# Allegro board imx6 rex_v1i2.brd
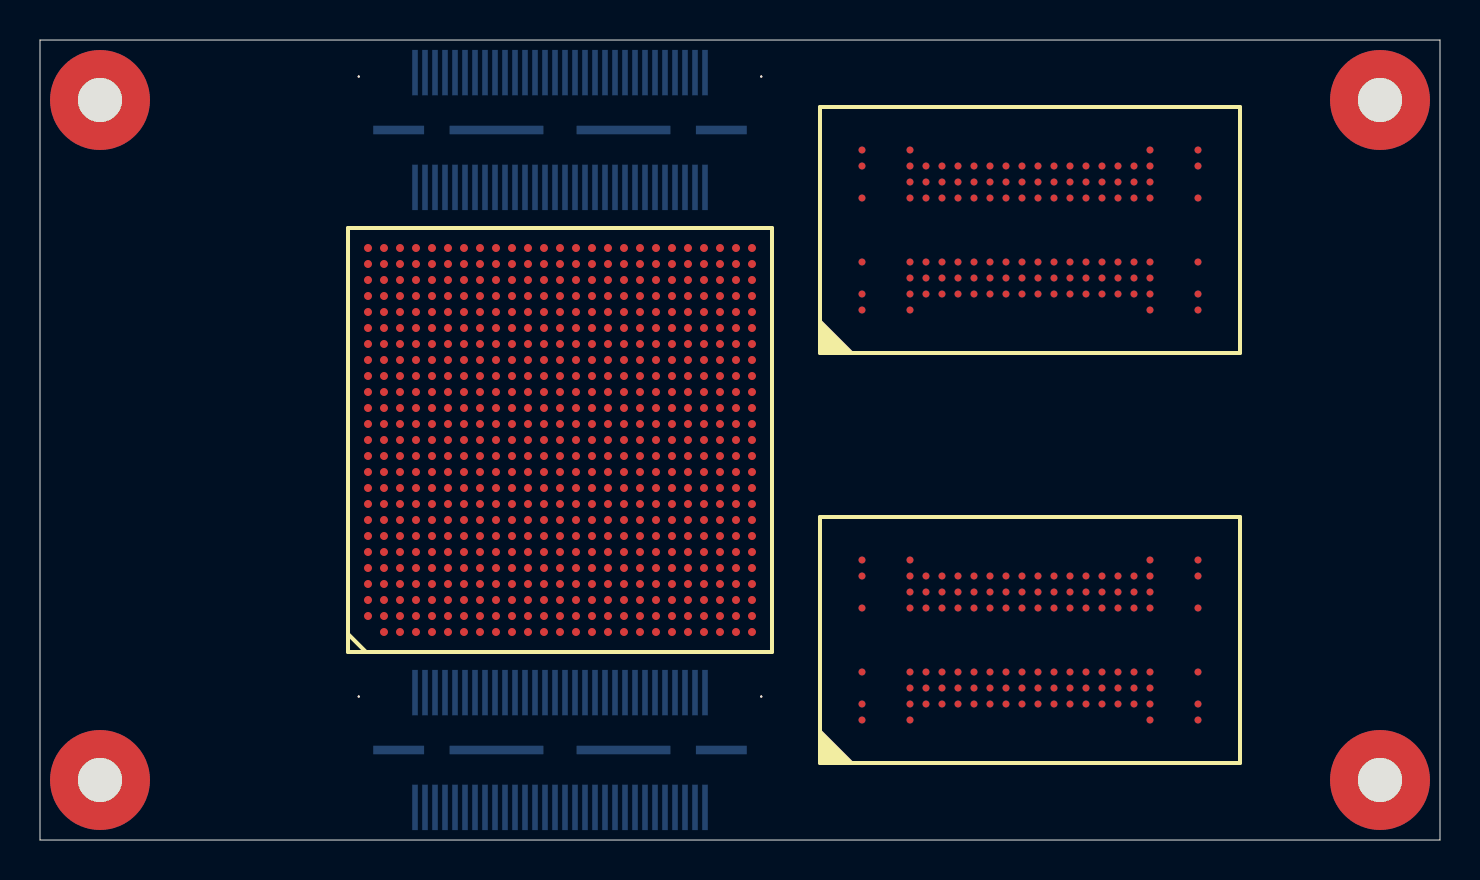
[diagram p0: board, top side]
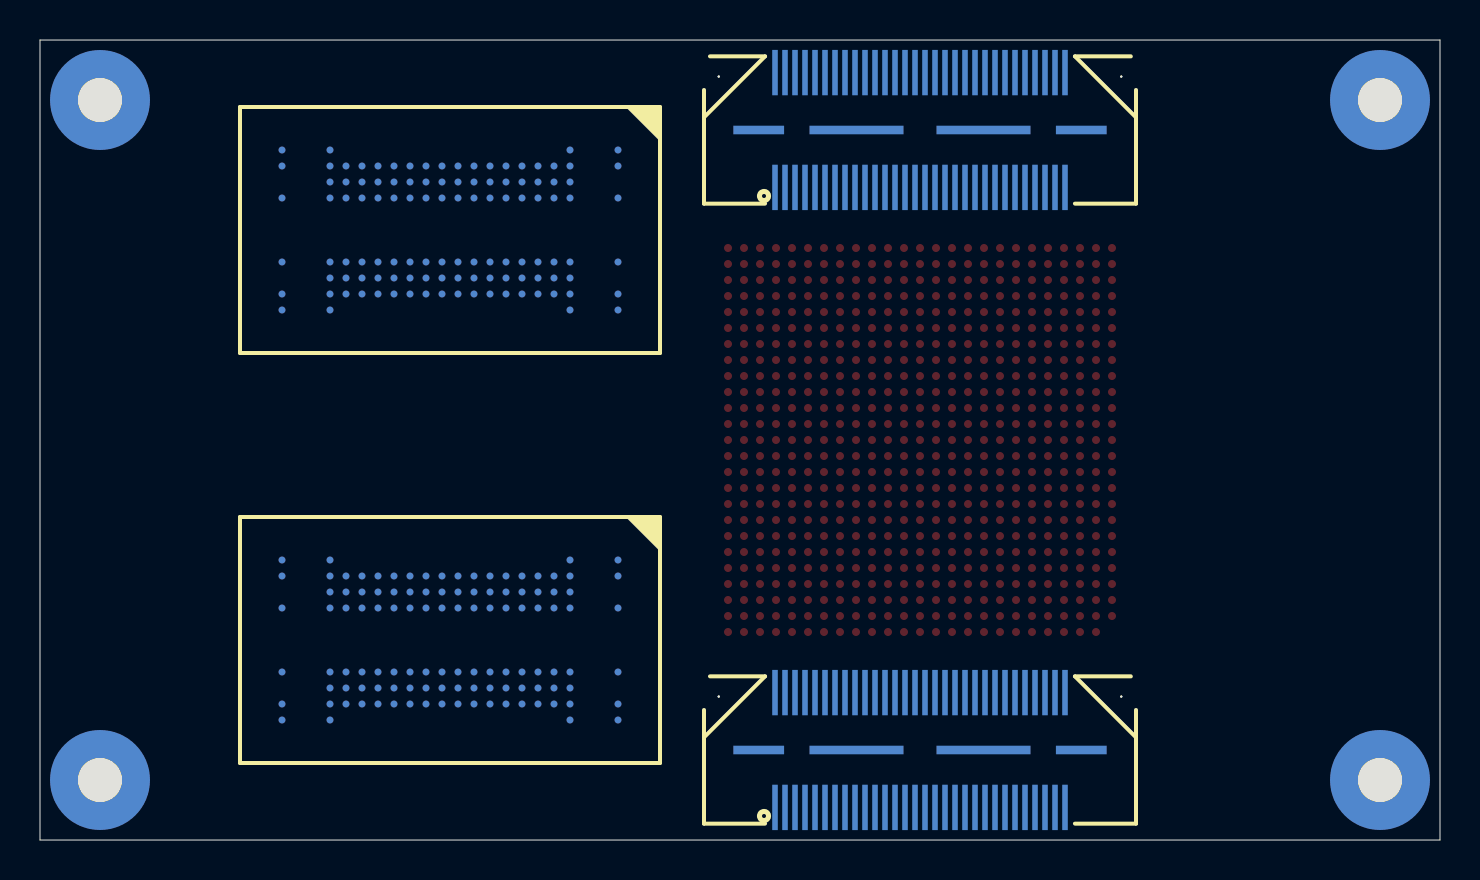
[diagram p1: board, bottom side, seen from below]

Outline 70 x 40 mm; copper layers: TOP, BOTTOM. Coordinates in mm from the lower left corner of the outline.
Outline path: 0,40 70,40 70,0 0,0 0,40

## Design rules (mm)
constraint set DEFAULT: min track width 0.127

## Placement (name value [footprint] x y rotation side)
J1  NA  [QSH-030-01-L-D-A]  26 35.5 90 bottom
J2  NA  [QSH-030-01-L-D-A]  26 4.5 90 bottom
MH1  MH_5MMC_2.2MMD  [MH_5MMD_2_2MMD]  3 37 0 top
MH2  MH_5MMC_2.2MMD  [MH_5MMD_2_2MMD]  67 37 0 top
MH3  MH_5MMC_2.2MMD  [MH_5MMD_2_2MMD]  67 3 0 top
MH4  MH_5MMC_2.2MMD  [MH_5MMD_2_2MMD]  3 3 0 top
U1  MCIMX6Q5EYM10AC  [PBGA624]  26 20 90 top
U2  MT41J128M16HA15EDTR  [96_FPGA_DD3]  49.5 10 90 top
U3  MT41J128M16HA15EDTR  [96_FPGA_DD3]  49.5 10 270 bottom
U4  MT41J128M16HA15EDTR  [96_FPGA_DD3]  49.5 30.5 90 top
U5  MT41J128M16HA15EDTR  [96_FPGA_DD3]  49.5 30.5 270 bottom

## Library data of the parts
J1 = QSH-030-01-L-D-A_J1: User Part Number: .PARTNO; Tolerance: .TOL
J2 = QSH-030-01-L-D-A_J2: User Part Number: .PARTNO; Tolerance: .TOL
MH1-MH4 = MH_5MMC_2.2MMD: User Part Number: .PARTNO; Tolerance: .TOL
U1 = MCIMX6Q5EYM10AC_U1: User Part Number: .PARTNO; Tolerance: .TOL
U2-U5 = MT41J128M16HA15EDTR: User Part Number: .PARTNO; Tolerance: .TOL

## Footprints (pads in the part's own frame, mm; a bottom-side part is the same pattern mirrored in y, then rotated)
96_FPGA_DD3
  round 0.35 smd: A1(-3.2,6) A2(-2.4,6) A3(-1.6,6) A7(1.6,6) A8(2.4,6) A9(3.2,6) B1(-3.2,5.2) B2(-2.4,5.2) B3(-1.6,5.2) B7(1.6,5.2) B8(2.4,5.2) B9(3.2,5.2) C1(-3.2,4.4) C2(-2.4,4.4) C3(-1.6,4.4) C7(1.6,4.4) C8(2.4,4.4) C9(3.2,4.4) D1(-3.2,3.6) D2(-2.4,3.6) D3(-1.6,3.6) D7(1.6,3.6) D8(2.4,3.6) D9(3.2,3.6) E1(-3.2,2.8) E2(-2.4,2.8) E3(-1.6,2.8) E7(1.6,2.8) E8(2.4,2.8) E9(3.2,2.8) F1(-3.2,2) F2(-2.4,2) F3(-1.6,2) F7(1.6,2) F8(2.4,2) F9(3.2,2) G1(-3.2,1.2) G2(-2.4,1.2) G3(-1.6,1.2) G7(1.6,1.2) G8(2.4,1.2) G9(3.2,1.2) H1(-3.2,0.4) H2(-2.4,0.4) H3(-1.6,0.4) H7(1.6,0.4) H8(2.4,0.4) H9(3.2,0.4) J1(-3.2,-0.4) J2(-2.4,-0.4) J3(-1.6,-0.4) J7(1.6,-0.4) J8(2.4,-0.4) J9(3.2,-0.4) K1(-3.2,-1.2) K2(-2.4,-1.2) K3(-1.6,-1.2) K7(1.6,-1.2) K8(2.4,-1.2) K9(3.2,-1.2) L1(-3.2,-2) L2(-2.4,-2) L3(-1.6,-2) L7(1.6,-2) L8(2.4,-2) L9(3.2,-2) M1(-3.2,-2.8) M2(-2.4,-2.8) M3(-1.6,-2.8) M7(1.6,-2.8) M8(2.4,-2.8) M9(3.2,-2.8) MECH01(-4,8.4) MECH02(-3.2,8.4) MECH03(-1.6,8.4) MECH04(1.6,8.4) MECH05(3.2,8.4) MECH06(4,8.4) MECH07(-4,6) MECH08(4,6) MECH09(-4,-6) MECH10(4,-6) MECH11(-4,-8.4) MECH12(-3.2,-8.4) MECH13(-1.6,-8.4) MECH14(1.6,-8.4) MECH15(3.2,-8.4) MECH16(4,-8.4) N1(-3.2,-3.6) N2(-2.4,-3.6) N3(-1.6,-3.6) N7(1.6,-3.6) N8(2.4,-3.6) N9(3.2,-3.6) P1(-3.2,-4.4) P2(-2.4,-4.4) P3(-1.6,-4.4) P7(1.6,-4.4) P8(2.4,-4.4) P9(3.2,-4.4) R1(-3.2,-5.2) R2(-2.4,-5.2) R3(-1.6,-5.2) R7(1.6,-5.2) R8(2.4,-5.2) R9(3.2,-5.2) T1(-3.2,-6) T2(-2.4,-6) T3(-1.6,-6) T7(1.6,-6) T8(2.4,-6) T9(3.2,-6)
MH_5MMD_2_2MMD
  round 5 hole 2.2: 1(0,0)
PBGA624
  round 0.4 smd: A2(-8.8,9.6) A3(-8,9.6) A4(-7.2,9.6) A5(-6.4,9.6) A6(-5.6,9.6) A7(-4.8,9.6) A8(-4,9.6) A9(-3.2,9.6) A10(-2.4,9.6) A11(-1.6,9.6) A12(-0.8,9.6) A13(0,9.6) A14(0.8,9.6) A15(1.6,9.6) A16(2.4,9.6) A17(3.2,9.6) A18(4,9.6) A19(4.8,9.6) A20(5.6,9.6) A21(6.4,9.6) A22(7.2,9.6) A23(8,9.6) A24(8.8,9.6) A25(9.6,9.6) AA1(-9.6,-6.4) AA2(-8.8,-6.4) AA3(-8,-6.4) AA4(-7.2,-6.4) AA5(-6.4,-6.4) AA6(-5.6,-6.4) AA7(-4.8,-6.4) AA8(-4,-6.4) AA9(-3.2,-6.4) AA10(-2.4,-6.4) AA11(-1.6,-6.4) AA12(-0.8,-6.4) AA13(0,-6.4) AA14(0.8,-6.4) AA15(1.6,-6.4) AA16(2.4,-6.4) AA17(3.2,-6.4) AA18(4,-6.4) AA19(4.8,-6.4) AA20(5.6,-6.4) AA21(6.4,-6.4) AA22(7.2,-6.4) AA23(8,-6.4) AA24(8.8,-6.4) AA25(9.6,-6.4) AB1(-9.6,-7.2) AB2(-8.8,-7.2) AB3(-8,-7.2) AB4(-7.2,-7.2) AB5(-6.4,-7.2) AB6(-5.6,-7.2) AB7(-4.8,-7.2) AB8(-4,-7.2) AB9(-3.2,-7.2) AB10(-2.4,-7.2) AB11(-1.6,-7.2) AB12(-0.8,-7.2) AB13(0,-7.2) AB14(0.8,-7.2) AB15(1.6,-7.2) AB16(2.4,-7.2) AB17(3.2,-7.2) AB18(4,-7.2) AB19(4.8,-7.2) AB20(5.6,-7.2) AB21(6.4,-7.2) AB22(7.2,-7.2) AB23(8,-7.2) AB24(8.8,-7.2) AB25(9.6,-7.2) AC1(-9.6,-8) AC2(-8.8,-8) AC3(-8,-8) AC4(-7.2,-8) AC5(-6.4,-8) AC6(-5.6,-8) AC7(-4.8,-8) AC8(-4,-8) AC9(-3.2,-8) AC10(-2.4,-8) AC11(-1.6,-8) AC12(-0.8,-8) AC13(0,-8) AC14(0.8,-8) AC15(1.6,-8) AC16(2.4,-8) AC17(3.2,-8) AC18(4,-8) AC19(4.8,-8) AC20(5.6,-8) AC21(6.4,-8) AC22(7.2,-8) AC23(8,-8) AC24(8.8,-8) AC25(9.6,-8) AD1(-9.6,-8.8) AD2(-8.8,-8.8) AD3(-8,-8.8) AD4(-7.2,-8.8) AD5(-6.4,-8.8) AD6(-5.6,-8.8) AD7(-4.8,-8.8) AD8(-4,-8.8) AD9(-3.2,-8.8) AD10(-2.4,-8.8) AD11(-1.6,-8.8) AD12(-0.8,-8.8) AD13(0,-8.8) AD14(0.8,-8.8) AD15(1.6,-8.8) AD16(2.4,-8.8) AD17(3.2,-8.8) AD18(4,-8.8) AD19(4.8,-8.8) AD20(5.6,-8.8) AD21(6.4,-8.8) AD22(7.2,-8.8) AD23(8,-8.8) AD24(8.8,-8.8) AD25(9.6,-8.8) AE1(-9.6,-9.6) AE2(-8.8,-9.6) AE3(-8,-9.6) AE4(-7.2,-9.6) AE5(-6.4,-9.6) AE6(-5.6,-9.6) AE7(-4.8,-9.6) AE8(-4,-9.6) AE9(-3.2,-9.6) AE10(-2.4,-9.6) AE11(-1.6,-9.6) AE12(-0.8,-9.6) AE13(0,-9.6) AE14(0.8,-9.6) AE15(1.6,-9.6) AE16(2.4,-9.6) AE17(3.2,-9.6) AE18(4,-9.6) AE19(4.8,-9.6) AE20(5.6,-9.6) AE21(6.4,-9.6) AE22(7.2,-9.6) AE23(8,-9.6) AE24(8.8,-9.6) AE25(9.6,-9.6) B1(-9.6,8.8) B2(-8.8,8.8) B3(-8,8.8) B4(-7.2,8.8) B5(-6.4,8.8) B6(-5.6,8.8) B7(-4.8,8.8) B8(-4,8.8) B9(-3.2,8.8) B10(-2.4,8.8) B11(-1.6,8.8) B12(-0.8,8.8) B13(0,8.8) B14(0.8,8.8) B15(1.6,8.8) B16(2.4,8.8) B17(3.2,8.8) B18(4,8.8) B19(4.8,8.8) B20(5.6,8.8) B21(6.4,8.8) B22(7.2,8.8) B23(8,8.8) B24(8.8,8.8) B25(9.6,8.8) C1(-9.6,8) C2(-8.8,8) C3(-8,8) C4(-7.2,8) C5(-6.4,8) C6(-5.6,8) C7(-4.8,8) C8(-4,8) C9(-3.2,8) C10(-2.4,8) C11(-1.6,8) C12(-0.8,8) C13(0,8) C14(0.8,8) C15(1.6,8) C16(2.4,8) C17(3.2,8) C18(4,8) C19(4.8,8) C20(5.6,8) C21(6.4,8) C22(7.2,8) C23(8,8) C24(8.8,8) C25(9.6,8) D1(-9.6,7.2) D2(-8.8,7.2) D3(-8,7.2) D4(-7.2,7.2) D5(-6.4,7.2) D6(-5.6,7.2) D7(-4.8,7.2) D8(-4,7.2) D9(-3.2,7.2) D10(-2.4,7.2) D11(-1.6,7.2) D12(-0.8,7.2) D13(0,7.2) D14(0.8,7.2) D15(1.6,7.2) D16(2.4,7.2) D17(3.2,7.2) D18(4,7.2) D19(4.8,7.2) D20(5.6,7.2) D21(6.4,7.2) D22(7.2,7.2) D23(8,7.2) D24(8.8,7.2) D25(9.6,7.2) E1(-9.6,6.4) E2(-8.8,6.4) E3(-8,6.4) E4(-7.2,6.4) E5(-6.4,6.4) E6(-5.6,6.4) E7(-4.8,6.4) E8(-4,6.4) E9(-3.2,6.4) E10(-2.4,6.4) E11(-1.6,6.4) E12(-0.8,6.4) E13(0,6.4) E14(0.8,6.4) E15(1.6,6.4) E16(2.4,6.4) E17(3.2,6.4) E18(4,6.4) E19(4.8,6.4) E20(5.6,6.4) E21(6.4,6.4) E22(7.2,6.4) E23(8,6.4) E24(8.8,6.4) E25(9.6,6.4) F1(-9.6,5.6) F2(-8.8,5.6) F3(-8,5.6) F4(-7.2,5.6) F5(-6.4,5.6) F6(-5.6,5.6) F7(-4.8,5.6) F8(-4,5.6) F9(-3.2,5.6) F10(-2.4,5.6) F11(-1.6,5.6) F12(-0.8,5.6) F13(0,5.6) F14(0.8,5.6) F15(1.6,5.6) F16(2.4,5.6) F17(3.2,5.6) F18(4,5.6) F19(4.8,5.6) F20(5.6,5.6) F21(6.4,5.6) F22(7.2,5.6) F23(8,5.6) F24(8.8,5.6) F25(9.6,5.6) G1(-9.6,4.8) G2(-8.8,4.8) G3(-8,4.8) G4(-7.2,4.8) G5(-6.4,4.8) G6(-5.6,4.8) G7(-4.8,4.8) G8(-4,4.8) G9(-3.2,4.8) G10(-2.4,4.8) G11(-1.6,4.8) G12(-0.8,4.8) G13(0,4.8) G14(0.8,4.8) G15(1.6,4.8) G16(2.4,4.8) G17(3.2,4.8) G18(4,4.8) G19(4.8,4.8) G20(5.6,4.8) G21(6.4,4.8) G22(7.2,4.8) G23(8,4.8) G24(8.8,4.8) G25(9.6,4.8) H1(-9.6,4) H2(-8.8,4) H3(-8,4) H4(-7.2,4) H5(-6.4,4) H6(-5.6,4) H7(-4.8,4) H8(-4,4) H9(-3.2,4) H10(-2.4,4) H11(-1.6,4) H12(-0.8,4) H13(0,4) H14(0.8,4) H15(1.6,4) H16(2.4,4) H17(3.2,4) H18(4,4) H19(4.8,4) H20(5.6,4) H21(6.4,4) H22(7.2,4) H23(8,4) H24(8.8,4) H25(9.6,4) J1(-9.6,3.2) J2(-8.8,3.2) J3(-8,3.2) J4(-7.2,3.2) J5(-6.4,3.2) J6(-5.6,3.2) J7(-4.8,3.2) J8(-4,3.2) J9(-3.2,3.2) J10(-2.4,3.2) J11(-1.6,3.2) J12(-0.8,3.2) J13(0,3.2) J14(0.8,3.2) J15(1.6,3.2) J16(2.4,3.2) J17(3.2,3.2) J18(4,3.2) J19(4.8,3.2) J20(5.6,3.2) J21(6.4,3.2) J22(7.2,3.2) J23(8,3.2) J24(8.8,3.2) J25(9.6,3.2) K1(-9.6,2.4) K2(-8.8,2.4) K3(-8,2.4) K4(-7.2,2.4) K5(-6.4,2.4) K6(-5.6,2.4) K7(-4.8,2.4) K8(-4,2.4) K9(-3.2,2.4) K10(-2.4,2.4) K11(-1.6,2.4) K12(-0.8,2.4) K13(0,2.4) K14(0.8,2.4) K15(1.6,2.4) K16(2.4,2.4) K17(3.2,2.4) K18(4,2.4) K19(4.8,2.4) K20(5.6,2.4) K21(6.4,2.4) K22(7.2,2.4) K23(8,2.4) K24(8.8,2.4) K25(9.6,2.4) L1(-9.6,1.6) L2(-8.8,1.6) L3(-8,1.6) L4(-7.2,1.6) L5(-6.4,1.6) L6(-5.6,1.6) L7(-4.8,1.6) L8(-4,1.6) L9(-3.2,1.6) L10(-2.4,1.6) L11(-1.6,1.6) L12(-0.8,1.6) L13(0,1.6) L14(0.8,1.6) L15(1.6,1.6) L16(2.4,1.6) L17(3.2,1.6) L18(4,1.6) L19(4.8,1.6) L20(5.6,1.6) L21(6.4,1.6) L22(7.2,1.6) L23(8,1.6) L24(8.8,1.6) L25(9.6,1.6) M1(-9.6,0.8) M2(-8.8,0.8) M3(-8,0.8) M4(-7.2,0.8) M5(-6.4,0.8) M6(-5.6,0.8) M7(-4.8,0.8) M8(-4,0.8) M9(-3.2,0.8) M10(-2.4,0.8) M11(-1.6,0.8) M12(-0.8,0.8) M13(0,0.8) M14(0.8,0.8) M15(1.6,0.8) M16(2.4,0.8) M17(3.2,0.8) M18(4,0.8) M19(4.8,0.8) M20(5.6,0.8) M21(6.4,0.8) M22(7.2,0.8) M23(8,0.8) M24(8.8,0.8) M25(9.6,0.8) N1(-9.6,0) N2(-8.8,0) N3(-8,0) N4(-7.2,0) N5(-6.4,0) N6(-5.6,0) N7(-4.8,0) N8(-4,0) N9(-3.2,0) N10(-2.4,0) N11(-1.6,0) N12(-0.8,0) N13(0,0) N14(0.8,0) N15(1.6,0) N16(2.4,0) N17(3.2,0) N18(4,0) N19(4.8,0) N20(5.6,0) N21(6.4,0) N22(7.2,0) N23(8,0) N24(8.8,0) N25(9.6,0) P1(-9.6,-0.8) P2(-8.8,-0.8) P3(-8,-0.8) P4(-7.2,-0.8) P5(-6.4,-0.8) P6(-5.6,-0.8) P7(-4.8,-0.8) P8(-4,-0.8) P9(-3.2,-0.8) P10(-2.4,-0.8) P11(-1.6,-0.8) P12(-0.8,-0.8) P13(0,-0.8) P14(0.8,-0.8) P15(1.6,-0.8) P16(2.4,-0.8) P17(3.2,-0.8) P18(4,-0.8) P19(4.8,-0.8) P20(5.6,-0.8) P21(6.4,-0.8) P22(7.2,-0.8) P23(8,-0.8) P24(8.8,-0.8) P25(9.6,-0.8) R1(-9.6,-1.6) R2(-8.8,-1.6) R3(-8,-1.6) R4(-7.2,-1.6) R5(-6.4,-1.6) R6(-5.6,-1.6) R7(-4.8,-1.6) R8(-4,-1.6) R9(-3.2,-1.6) R10(-2.4,-1.6) R11(-1.6,-1.6) R12(-0.8,-1.6) R13(0,-1.6) R14(0.8,-1.6) R15(1.6,-1.6) R16(2.4,-1.6) R17(3.2,-1.6) R18(4,-1.6) R19(4.8,-1.6) R20(5.6,-1.6) R21(6.4,-1.6) R22(7.2,-1.6) R23(8,-1.6) R24(8.8,-1.6) R25(9.6,-1.6) T1(-9.6,-2.4) T2(-8.8,-2.4) T3(-8,-2.4) T4(-7.2,-2.4) T5(-6.4,-2.4) T6(-5.6,-2.4) T7(-4.8,-2.4) T8(-4,-2.4) T9(-3.2,-2.4) T10(-2.4,-2.4) T11(-1.6,-2.4) T12(-0.8,-2.4) T13(0,-2.4) T14(0.8,-2.4) T15(1.6,-2.4) T16(2.4,-2.4) T17(3.2,-2.4) T18(4,-2.4) T19(4.8,-2.4) T20(5.6,-2.4) T21(6.4,-2.4) T22(7.2,-2.4) T23(8,-2.4) T24(8.8,-2.4) T25(9.6,-2.4) U1(-9.6,-3.2) U2(-8.8,-3.2) U3(-8,-3.2) U4(-7.2,-3.2) U5(-6.4,-3.2) U6(-5.6,-3.2) U7(-4.8,-3.2) U8(-4,-3.2) U9(-3.2,-3.2) U10(-2.4,-3.2) U11(-1.6,-3.2) U12(-0.8,-3.2) U13(0,-3.2) U14(0.8,-3.2) U15(1.6,-3.2) U16(2.4,-3.2) U17(3.2,-3.2) U18(4,-3.2) U19(4.8,-3.2) U20(5.6,-3.2) U21(6.4,-3.2) U22(7.2,-3.2) U23(8,-3.2) U24(8.8,-3.2) U25(9.6,-3.2) V1(-9.6,-4) V2(-8.8,-4) V3(-8,-4) V4(-7.2,-4) V5(-6.4,-4) V6(-5.6,-4) V7(-4.8,-4) V8(-4,-4) V9(-3.2,-4) V10(-2.4,-4) V11(-1.6,-4) V12(-0.8,-4) V13(0,-4) V14(0.8,-4) V15(1.6,-4) V16(2.4,-4) V17(3.2,-4) V18(4,-4) V19(4.8,-4) V20(5.6,-4) V21(6.4,-4) V22(7.2,-4) V23(8,-4) V24(8.8,-4) V25(9.6,-4) W1(-9.6,-4.8) W2(-8.8,-4.8) W3(-8,-4.8) W4(-7.2,-4.8) W5(-6.4,-4.8) W6(-5.6,-4.8) W7(-4.8,-4.8) W8(-4,-4.8) W9(-3.2,-4.8) W10(-2.4,-4.8) W11(-1.6,-4.8) W12(-0.8,-4.8) W13(0,-4.8) W14(0.8,-4.8) W15(1.6,-4.8) W16(2.4,-4.8) W17(3.2,-4.8) W18(4,-4.8) W19(4.8,-4.8) W20(5.6,-4.8) W21(6.4,-4.8) W22(7.2,-4.8) W23(8,-4.8) W24(8.8,-4.8) W25(9.6,-4.8) Y1(-9.6,-5.6) Y2(-8.8,-5.6) Y3(-8,-5.6) Y4(-7.2,-5.6) Y5(-6.4,-5.6) Y6(-5.6,-5.6) Y7(-4.8,-5.6) Y8(-4,-5.6) Y9(-3.2,-5.6) Y10(-2.4,-5.6) Y11(-1.6,-5.6) Y12(-0.8,-5.6) Y13(0,-5.6) Y14(0.8,-5.6) Y15(1.6,-5.6) Y16(2.4,-5.6) Y17(3.2,-5.6) Y18(4,-5.6) Y19(4.8,-5.6) Y20(5.6,-5.6) Y21(6.4,-5.6) Y22(7.2,-5.6) Y23(8,-5.6) Y24(8.8,-5.6) Y25(9.6,-5.6)
QSH-030-01-L-D-A
  rect 2.27x0.28 smd: 1(-2.87,7.25) 2(2.87,7.25) 3(-2.87,6.75) 4(2.87,6.75) 5(-2.87,6.25) 6(2.87,6.25) 7(-2.87,5.75) 8(2.87,5.75) 9(-2.87,5.25) 10(2.87,5.25) 11(-2.87,4.75) 12(2.87,4.75) 13(-2.87,4.25) 14(2.87,4.25) 15(-2.87,3.75) 16(2.87,3.75) 17(-2.87,3.25) 18(2.87,3.25) 19(-2.87,2.75) 20(2.87,2.75) 21(-2.87,2.25) 22(2.87,2.25) 23(-2.87,1.75) 24(2.87,1.75) 25(-2.87,1.25) 26(2.87,1.25) 27(-2.87,0.75) 28(2.87,0.75) 29(-2.87,0.25) 30(2.87,0.25) 31(-2.87,-0.25) 32(2.87,-0.25) 33(-2.87,-0.75) 34(2.87,-0.75) 35(-2.87,-1.25) 36(2.87,-1.25) 37(-2.87,-1.75) 38(2.87,-1.75) 39(-2.87,-2.25) 40(2.87,-2.25) 41(-2.87,-2.75) 42(2.87,-2.75) 43(-2.87,-3.25) 44(2.87,-3.25) 45(-2.87,-3.75) 46(2.87,-3.75) 47(-2.87,-4.25) 48(2.87,-4.25) 49(-2.87,-4.75) 50(2.87,-4.75) 51(-2.87,-5.25) 52(2.87,-5.25) 53(-2.87,-5.75) 54(2.87,-5.75) 55(-2.87,-6.25) 56(2.87,-6.25) 57(-2.87,-6.75) 58(2.87,-6.75) 59(-2.87,-7.25) 60(2.87,-7.25)
  rect 0.43x2.54 smd: 61(0,8.065) 64(0,-8.065)
  rect 0.43x4.7 smd: 62(0,3.175) 63(0,-3.175)
  round 0.105 hole 1.05: 65(2.67,10.065) 66(2.67,-10.065)

## Nets
+1V1_NVCC_PLL_OUT: U1.E8
+1V1_VDDSOC_CAP: U1.N12 U1.R10 U1.T10 U1.T13 U1.T14 U1.U10 U1.U13 U1.U14
+1V2_VDD_ARM_CAP: U1.H11 U1.H13 U1.J11 U1.J13 U1.K11 U1.K13 U1.L11 U1.L13 U1.M11 U1.M13 U1.N11 U1.N13 U1.P11 U1.P13 U1.R11 U1.R13
+1V5_DDR: U1.R18 U1.T18 U1.U18 U1.V9 U1.V10 U1.V11 U1.V12 U1.V13 U1.V14 U1.V15 U1.V16 U1.V17 U1.V18 U2.A1 U2.A8 U2.B2 U2.C1 U2.C9 U2.D2 U2.D9 U2.E9 U2.F1 U2.G7 U2.H2 U2.H9 U2.K2 U2.K8 U2.N1 U2.N9 U2.R1 U2.R9 U3.A1 U3.A8 U3.B2 U3.C1 U3.C9 U3.D2 U3.D9 U3.E9 U3.F1 U3.G7 U3.H2 U3.H9 U3.K2 U3.K8 U3.N1 U3.N9 U3.R1 U3.R9 U4.A1 U4.A8 U4.B2 U4.C1 U4.C9 U4.D2 U4.D9 U4.E9 U4.F1 U4.G7 U4.H2 U4.H9 U4.K2 U4.K8 U4.N1 U4.N9 U4.R1 U4.R9 U5.A1 U5.A8 U5.B2 U5.C1 U5.C9 U5.D2 U5.D9 U5.E9 U5.F1 U5.G7 U5.H2 U5.H9 U5.K2 U5.K8 U5.N1 U5.N9 U5.R1 U5.R9
+1V375: U1.H14 U1.J14 U1.K9 U1.K14 U1.L9 U1.L14 U1.M9 U1.M14 U1.N9 U1.N14 U1.P9 U1.P14 U1.R9 U1.R14 U1.T9 U1.U9
+1V375_VDDSOC_IN: U1.H16 U1.J16 U1.K16 U1.L16 U1.M16 U1.N16 U1.P16 U1.R16 U1.T16 U1.U16
+2V5_VDDHIGH_VPH: U1.H10 U1.J10
+3V0_ALWAYS: U1.G11 U1.H9 U1.J9
+3V3: J2.50 U1.G14 U1.G15 U1.G16 U1.G17 U1.J7 U1.K19 U1.L19 U1.M19 U1.P7 U1.P19
+5V_USB_VBUS: J1.18 U1.D10 U1.E9
+VDD_SNVS_CAP: U1.G9
+VDDPU: U1.H17 U1.J17 U1.K17 U1.L17 U1.M17 U1.N17 U1.P17
+VDDUSB: U1.F9
+VIN: J1.1 J1.2 J1.3 J1.4 J1.5
GND: MH1.1 MH2.1 MH3.1 MH4.1 U1.A4 U1.A5 U1.A8 U1.A13 U1.A25 U1.AA7 U1.AA10 U1.AA13 U1.AA16 U1.AA19 U1.AA22 U1.AB3 U1.AB24 U1.AD4 U1.AD7 U1.AD10 U1.AD13 U1.AD16 U1.AD19 U1.AD22 U1.AE1 U1.AE25 U1.B4 U1.B5 U1.C1 U1.C4 U1.C6 U1.C10 U1.D3 U1.D6 U1.D8 U1.E5 U1.E6 U1.E7 U1.F5 U1.F6 U1.F7 U1.F8 U1.G3 U1.G10 U1.G19 U1.H8 U1.H12 U1.H15 U1.H18 U1.J2 U1.J8 U1.J12 U1.J15 U1.J18 U1.K8 U1.K10 U1.K12 U1.K15 U1.K18 U1.L2 U1.L5 U1.L8 U1.L10 U1.L12 U1.L15 U1.L18 U1.M8 U1.M10 U1.M12 U1.M15 U1.M18 U1.N8 U1.N10 U1.N15 U1.N18 U1.P8 U1.P10 U1.P12 U1.P15 U1.P18 U1.R8 U1.R12 U1.R15 U1.R17 U1.T8 U1.T11 U1.T12 U1.T15 U1.T17 U1.T19 U1.U8 U1.U11 U1.U12 U1.U15 U1.U17 U1.U19 U1.V8 U1.V19 U1.W3 U1.W7 U1.W8 U1.W9 U1.W10 U1.W11 U1.W12 U1.W13 U1.W15 U1.W16 U1.W17 U1.W18 U1.W19 U1.Y5 U1.Y24 U2.A9 U2.B1 U2.B3 U2.B9 U2.D1 U2.D8 U2.E1 U2.E2 U2.E8 U2.F9 U2.G1 U2.G8 U2.G9 U2.J2 U2.J8 U2.M1 U2.M9 U2.P1 U2.P9 U2.T1 U2.T9 U3.A9 U3.B1 U3.B3 U3.B9 U3.D1 U3.D8 U3.E1 U3.E2 U3.E8 U3.F9 U3.G1 U3.G8 U3.G9 U3.J2 U3.J8 U3.M1 U3.M9 U3.P1 U3.P9 U3.T1 U3.T9 U4.A9 U4.B1 U4.B3 U4.B9 U4.D1 U4.D8 U4.E1 U4.E2 U4.E8 U4.F9 U4.G1 U4.G8 U4.G9 U4.J2 U4.J8 U4.M1 U4.M9 U4.P1 U4.P9 U4.T1 U4.T9 U5.A9 U5.B1 U5.B3 U5.B9 U5.D1 U5.D8 U5.E1 U5.E2 U5.E8 U5.F9 U5.G1 U5.G8 U5.G9 U5.J2 U5.J8 U5.M1 U5.M9 U5.P1 U5.P9 U5.T1 U5.T9
+DDR_VREF: U1.AC2 U2.H1 U2.M8 U3.H1 U3.M8 U4.H1 U4.M8 U5.H1 U5.M8
+HDMI_VP: U1.L7
+HDMI_VPH: U1.M7
+LVDS_2V5: U1.V7
+NVCC_CSI: U1.N7
+NVCC_ENET: U1.R19
+NVCC_MIPI: U1.K7
+NVCC_RGMII: U1.G18
+PCIE_VP: U1.H7
+PCIE_VPH: U1.G7
+PCIE_VPTX: U1.G8
+SATA_VP: U1.G13
+SATA_VPH: U1.G12
AUD3_CLK_[03] - CONNECTORS.SCHDOC: J2.20
AUD3_CLK_R: U1.T5
AUD3_RXD_[03] - CONNECTORS.SCHDOC: J2.22
AUD3_RXD_[09] - CPU - UART, AUDIO.SCHDOC: U1.N3
AUD3_TXC_[03] - CONNECTORS.SCHDOC: J2.16
AUD3_TXC_R: U1.N1
AUD3_TXD_[03] - CONNECTORS.SCHDOC: J2.18
AUD3_TXD_[09] - CPU - UART, AUDIO.SCHDOC: U1.P2
AUD3_TXFS_[03] - CONNECTORS.SCHDOC: J2.24
AUD3_TXFS_[09] - CPU - UART, AUDIO.SCHDOC: U1.N4
BOARD_VARIANT_0: U1.G24
BOARD_VARIANT_1: U1.H25
BOOT_MODE0: U1.C12
BOOT_MODE1: U1.F12
BOOT_MODE_[03] - CONNECTORS.SCHDOC: J1.50
CLK1_C_N: U1.C7
CLK1_C_P: U1.D7
CLK1_N_[03] - CONNECTORS.SCHDOC: J2.46
CLK1_P_[03] - CONNECTORS.SCHDOC: J2.48
CPU_XTALI: U1.A7
CPU_XTALO: U1.B7
CSPI2_CLK_[03] - CONNECTORS.SCHDOC: J1.17
CSPI2_CLK_R: U1.U23
CSPI2_CS0_[03] - CONNECTORS.SCHDOC: J1.19
CSPI2_CS0_[08] - CPU - SPI, I2C, SD, MMC.SCHDOC: U1.V25
CSPI2_MISO_[03] - CONNECTORS.SCHDOC: J1.21
CSPI2_MISO_[08] - CPU - SPI, I2C, SD, MMC.SCHDOC: U1.U24
CSPI2_MOSI_[03] - CONNECTORS.SCHDOC: J1.23
CSPI2_MOSI_[08] - CPU - SPI, I2C, SD, MMC.SCHDOC: U1.T21
CSPI3_CLK_R: U1.P24
CSPI3_CS2_[08] - CPU - SPI, I2C, SD, MMC.SCHDOC: U1.R25
CSPI3_MISO_[08] - CPU - SPI, I2C, SD, MMC.SCHDOC: U1.P23
CSPI3_MOSI_[08] - CPU - SPI, I2C, SD, MMC.SCHDOC: U1.P22
DRAM0_ZQ: U2.L8(ZQ)
DRAM1_ZQ: U3.L8(ZQ)
DRAM2_ZQ: U4.L8(ZQ)
DRAM3_ZQ: U5.L8(ZQ)
DRAM_A0: U1.AC14 U2.N3 U3.N3 U4.N3 U5.N3
DRAM_A1: U1.AB14 U2.P7 U3.P7 U4.P7 U5.P7
DRAM_A2: U1.AA14 U2.P3 U3.P3 U4.P3 U5.P3
DRAM_A3: U1.Y14 U2.N2 U3.N2 U4.N2 U5.N2
DRAM_A4: U1.W14 U2.P8 U3.P8 U4.P8 U5.P8
DRAM_A5: U1.AE13 U2.P2 U3.P2 U4.P2 U5.P2
DRAM_A6: U1.AC13 U2.R8 U3.R8 U4.R8 U5.R8
DRAM_A7: U1.Y13 U2.R2 U3.R2 U4.R2 U5.R2
DRAM_A8: U1.AB13 U2.T8 U3.T8 U4.T8 U5.T8
DRAM_A9: U1.AE12 U2.R3 U3.R3 U4.R3 U5.R3
DRAM_A10: U1.AA15 U2.L7 U3.L7 U4.L7 U5.L7
DRAM_A11: U1.AC12 U2.R7 U3.R7 U4.R7 U5.R7
DRAM_A12: U1.AD12 U2.N7 U3.N7 U4.N7 U5.N7
DRAM_A13: U1.AC17 U2.T3 U3.T3 U4.T3 U5.T3
DRAM_A14: U1.AA12 U2.T7 U3.T7 U4.T7 U5.T7
DRAM_A15: U1.Y12 U2.M7 U3.M7 U4.M7 U5.M7
DRAM_CAS_B: U1.AE16 U2.K3 U3.K3 U4.K3 U5.K3
DRAM_CLK0_N: U1.AE15 U4.K7 U5.K7
DRAM_CLK0_P: U1.AD15 U4.J7 U5.J7
DRAM_CLK1_N: U1.AE14 U2.K7 U3.K7
DRAM_CLK1_P: U1.AD14 U2.J7 U3.J7
DRAM_CS0_B: U1.Y16 U2.L2 U3.L2 U4.L2 U5.L2
DRAM_D0: U1.AD2 U2.D7
DRAM_D1: U1.AE2 U2.B8
DRAM_D2: U1.AC4 U2.C8
DRAM_D3: U1.AA5 U2.A3
DRAM_D4: U1.AC1 U2.C2
DRAM_D5: U1.AD1 U2.C3
DRAM_D6: U1.AB4 U2.A2
DRAM_D7: U1.AE4 U2.A7
DRAM_D8: U1.AD5 U2.E3
DRAM_D9: U1.AE5 U2.F7
DRAM_D10: U1.AA6 U2.G2
DRAM_D11: U1.AE7 U2.H7
DRAM_D12: U1.AB5 U2.H3
DRAM_D13: U1.AC5 U2.F2
DRAM_D14: U1.AB6 U2.F8
DRAM_D15: U1.AC7 U2.H8
DRAM_D16: U1.AB7 U3.E3
DRAM_D17: U1.AA8 U3.F8
DRAM_D18: U1.AB9 U3.H7
DRAM_D19: U1.Y9 U3.H3
DRAM_D20: U1.Y7 U3.H8
DRAM_D21: U1.Y8 U3.G2
DRAM_D22: U1.AC8 U3.F7
DRAM_D23: U1.AA9 U3.F2
DRAM_D24: U1.AE9 U3.D7
DRAM_D25: U1.Y10 U3.A7
DRAM_D26: U1.AE11 U3.C3
DRAM_D27: U1.AB11 U3.C2
DRAM_D28: U1.AC9 U3.C8
DRAM_D29: U1.AD9 U3.B8
DRAM_D30: U1.AD11 U3.A2
DRAM_D31: U1.AC11 U3.A3
DRAM_D32: U1.AA17 U5.E3
DRAM_D33: U1.AA18 U5.G2
DRAM_D34: U1.AC18 U5.F8
DRAM_D35: U1.AE19 U5.H7
DRAM_D36: U1.Y17 U5.H3
DRAM_D37: U1.Y18 U5.F2
DRAM_D38: U1.AB19 U5.H8
DRAM_D39: U1.AC19 U5.F7
DRAM_D40: U1.Y19 U5.D7
DRAM_D41: U1.AB20 U5.B8
DRAM_D42: U1.AB21 U5.C2
DRAM_D43: U1.AD21 U5.A7
DRAM_D44: U1.Y20 U5.A2
DRAM_D45: U1.AA20 U5.C8
DRAM_D46: U1.AE21 U5.A3
DRAM_D47: U1.AC21 U5.C3
DRAM_D48: U1.AC22 U4.D7
DRAM_D49: U1.AE22 U4.C2
DRAM_D50: U1.AE24 U4.C3
DRAM_D51: U1.AC24 U4.B8
DRAM_D52: U1.AB22 U4.A7
DRAM_D53: U1.AC23 U4.C8
DRAM_D54: U1.AD25 U4.A3
DRAM_D55: U1.AC25 U4.A2
DRAM_D56: U1.AB25 U4.E3
DRAM_D57: U1.AA21 U4.G2
DRAM_D58: U1.Y25 U4.H7
DRAM_D59: U1.Y22 U4.F7
DRAM_D60: U1.AB23 U4.H3
DRAM_D61: U1.AA23 U4.F2
DRAM_D62: U1.Y23 U4.F8
DRAM_D63: U1.W25 U4.H8
DRAM_DQM0: U1.AC3 U2.D3
DRAM_DQM1: U1.AC6 U2.E7
DRAM_DQM2: U1.AB8 U3.E7
DRAM_DQM3: U1.AE10 U3.D3
DRAM_DQM4: U1.AB18 U5.E7
DRAM_DQM5: U1.AC20 U5.D3
DRAM_DQM6: U1.AD24 U4.D3
DRAM_DQM7: U1.Y21 U4.E7
DRAM_DQS0_N: U1.AD3 U2.B7
DRAM_DQS0_P: U1.AE3 U2.C7
DRAM_DQS1_N: U1.AE6 U2.G3
DRAM_DQS1_P: U1.AD6 U2.F3
DRAM_DQS2_N: U1.AE8 U3.G3
DRAM_DQS2_P: U1.AD8 U3.F3
DRAM_DQS3_N: U1.AB10 U3.B7
DRAM_DQS3_P: U1.AC10 U3.C7
DRAM_DQS4_N: U1.AE18 U5.G3
DRAM_DQS4_P: U1.AD18 U5.F3
DRAM_DQS5_N: U1.AE20 U5.B7
DRAM_DQS5_P: U1.AD20 U5.C7
DRAM_DQS6_N: U1.AE23 U4.B7
DRAM_DQS6_P: U1.AD23 U4.C7
DRAM_DQS7_N: U1.AA24 U4.G3
DRAM_DQS7_P: U1.AA25 U4.F3
DRAM_RAS_B: U1.AB15 U2.J3 U3.J3 U4.J3 U5.J3
DRAM_RESET_B: U1.Y6 U2.T2 U3.T2 U4.T2 U5.T2
DRAM_SDBA0: U1.AC15 U2.M2 U3.M2 U4.M2 U5.M2
DRAM_SDBA1: U1.Y15 U2.N8 U3.N8 U4.N8 U5.N8
DRAM_SDBA2: U1.AB12 U2.M3 U3.M3 U4.M3 U5.M3
DRAM_SDCKE0: U1.Y11 U2.K9 U3.K9 U4.K9 U5.K9
DRAM_SDODT0: U1.AC16 U2.K1 U3.K1 U4.K1 U5.K1
DRAM_WE_B: U1.AB16 U2.L3 U3.L3 U4.L3 U5.L3
ENET_LED_LINK_[03] - CONNECTORS.SCHDOC: J1.56
ENET_LED_RX_[03] - CONNECTORS.SCHDOC: J1.55
ENET_REF_CLK_[07] - CPU - USB, ETHERNET.SCHDOC: U1.V22
GPANAIO: U1.C8
HDMI_CEC: U1.W4
HDMI_CEC_IN_[03] - CONNECTORS.SCHDOC: J1.44
HDMI_CLK_N_[03] - CONNECTORS.SCHDOC: J1.45
HDMI_CLK_N_[06] - CPU - HDMI, LVDS.SCHDOC: U1.J5
HDMI_CLK_P_[03] - CONNECTORS.SCHDOC: J1.47
HDMI_CLK_P_[06] - CPU - HDMI, LVDS.SCHDOC: U1.J6
HDMI_D0_N_[03] - CONNECTORS.SCHDOC: J1.39
HDMI_D0_N_[06] - CPU - HDMI, LVDS.SCHDOC: U1.K5
HDMI_D0_P_[03] - CONNECTORS.SCHDOC: J1.41
HDMI_D0_P_[06] - CPU - HDMI, LVDS.SCHDOC: U1.K6
HDMI_D1_N_[03] - CONNECTORS.SCHDOC: J1.46
HDMI_D1_N_[06] - CPU - HDMI, LVDS.SCHDOC: U1.J3
HDMI_D1_P_[03] - CONNECTORS.SCHDOC: J1.48
HDMI_D1_P_[06] - CPU - HDMI, LVDS.SCHDOC: U1.J4
HDMI_D2_N_[03] - CONNECTORS.SCHDOC: J1.40
HDMI_D2_N_[06] - CPU - HDMI, LVDS.SCHDOC: U1.K3
HDMI_D2_P_[03] - CONNECTORS.SCHDOC: J1.42
HDMI_D2_P_[06] - CPU - HDMI, LVDS.SCHDOC: U1.K4
HDMI_DDC: U1.K2
HDMI_HPD_[03] - CONNECTORS.SCHDOC: J1.43
HDMI_HPD_[06] - CPU - HDMI, LVDS.SCHDOC: U1.K1
HDMI_RESREF: U1.J1
I2C1_SCL_[03] - CONNECTORS.SCHDOC: J2.14
I2C1_SCL_[09] - CPU - UART, AUDIO.SCHDOC: U1.N5
I2C1_SDA_[03] - CONNECTORS.SCHDOC: J2.12
I2C1_SDA_[09] - CPU - UART, AUDIO.SCHDOC: U1.N6
I2C2_SCL_[03] - CONNECTORS.SCHDOC: J1.36
I2C2_SCL_[06] - CPU - HDMI, LVDS.SCHDOC: U1.U5
I2C2_SDA_[03] - CONNECTORS.SCHDOC: J1.38
I2C2_SDA_[06] - CPU - HDMI, LVDS.SCHDOC: U1.T7
I2C3_SCL_[03] - CONNECTORS.SCHDOC: J2.19
I2C3_SCL_[06] - CPU - HDMI, LVDS.SCHDOC: U1.F21
I2C3_SDA_[03] - CONNECTORS.SCHDOC: J2.17
I2C3_SDA_[06] - CPU - HDMI, LVDS.SCHDOC: U1.D24
I2C4_SCL_[03] - CONNECTORS.SCHDOC: J1.35
I2C4_SCL_[08] - CPU - SPI, I2C, SD, MMC.SCHDOC: U1.E15
I2C4_SDA_[03] - CONNECTORS.SCHDOC: J1.37
I2C4_SDA_[08] - CPU - SPI, I2C, SD, MMC.SCHDOC: U1.D16
JTAG_MOD: U1.H6
JTAG_NTRST_[03] - CONNECTORS.SCHDOC: J2.41
JTAG_NTRST_[10] - CPU - JTAG, CONTROL.SCHDOC: U1.C2
JTAG_TCK_[03] - CONNECTORS.SCHDOC: J2.43
JTAG_TCK_R: U1.H5
JTAG_TDI_[03] - CONNECTORS.SCHDOC: J2.47
JTAG_TDI_R: U1.G5
JTAG_TDO_[03] - CONNECTORS.SCHDOC: J2.45
JTAG_TDO_R: U1.G6
JTAG_TMS_[03] - CONNECTORS.SCHDOC: J2.49
JTAG_TMS_[10] - CPU - JTAG, CONTROL.SCHDOC: U1.C3
LVDS0_CABC_[03] - CONNECTORS.SCHDOC: J2.6
LVDS0_CABC_[06] - CPU - HDMI, LVDS.SCHDOC: U1.A17
LVDS0_CLK_N_[03] - CONNECTORS.SCHDOC: J2.13
LVDS0_CLK_N_[06] - CPU - HDMI, LVDS.SCHDOC: U1.V4
LVDS0_CLK_P_[03] - CONNECTORS.SCHDOC: J2.15
LVDS0_CLK_P_[06] - CPU - HDMI, LVDS.SCHDOC: U1.V3
LVDS0_PWM_[03] - CONNECTORS.SCHDOC: J2.5
LVDS0_PWM_[06] - CPU - HDMI, LVDS.SCHDOC: U1.F18
LVDS0_TX0_N_[03] - CONNECTORS.SCHDOC: J2.2
LVDS0_TX0_N_[06] - CPU - HDMI, LVDS.SCHDOC: U1.U2
LVDS0_TX0_P_[03] - CONNECTORS.SCHDOC: J2.4
LVDS0_TX0_P_[06] - CPU - HDMI, LVDS.SCHDOC: U1.U1
LVDS0_TX1_N_[03] - CONNECTORS.SCHDOC: J2.8
LVDS0_TX1_N_[06] - CPU - HDMI, LVDS.SCHDOC: U1.U4
LVDS0_TX1_P_[03] - CONNECTORS.SCHDOC: J2.10
LVDS0_TX1_P_[06] - CPU - HDMI, LVDS.SCHDOC: U1.U3
LVDS0_TX2_N_[03] - CONNECTORS.SCHDOC: J2.1
LVDS0_TX2_N_[06] - CPU - HDMI, LVDS.SCHDOC: U1.V2
LVDS0_TX2_P_[03] - CONNECTORS.SCHDOC: J2.3
LVDS0_TX2_P_[06] - CPU - HDMI, LVDS.SCHDOC: U1.V1
LVDS0_TX3_N_[03] - CONNECTORS.SCHDOC: J2.7
LVDS0_TX3_N_[06] - CPU - HDMI, LVDS.SCHDOC: U1.W2
LVDS0_TX3_P_[03] - CONNECTORS.SCHDOC: J2.9
LVDS0_TX3_P_[06] - CPU - HDMI, LVDS.SCHDOC: U1.W1
MECH01: U2.MECH01 U3.MECH01 U4.MECH01 U5.MECH01
MECH02: U2.MECH02 U3.MECH02 U4.MECH02 U5.MECH02
MECH03: U2.MECH03 U3.MECH03 U4.MECH03 U5.MECH03
MECH04: U2.MECH04 U3.MECH04 U4.MECH04 U5.MECH04
MECH05: U2.MECH05 U3.MECH05 U4.MECH05 U5.MECH05
MECH06: U2.MECH06 U3.MECH06 U4.MECH06 U5.MECH06
MECH07: U2.MECH07 U3.MECH07 U4.MECH07 U5.MECH07
MECH08: U2.MECH08 U3.MECH08 U4.MECH08 U5.MECH08
MECH09: U2.MECH09 U3.MECH09 U4.MECH09 U5.MECH09
MECH010: U2.MECH10 U3.MECH10 U4.MECH10 U5.MECH10
MECH011: U2.MECH11 U3.MECH11 U4.MECH11 U5.MECH11
MECH012: U2.MECH12 U3.MECH12 U4.MECH12 U5.MECH12
MECH013: U2.MECH13 U3.MECH13 U4.MECH13 U5.MECH13
MECH014: U2.MECH14 U3.MECH14 U4.MECH14 U5.MECH14
MECH015: U2.MECH15 U3.MECH15 U4.MECH15 U5.MECH15
MECH016: U2.MECH16 U3.MECH16 U4.MECH16 U5.MECH16
ON_OFF_[03] - CONNECTORS.SCHDOC: J1.6
ON_OFF_[10] - CPU - JTAG, CONTROL.SCHDOC: U1.D12
PCIE_C_TX_N: U1.A3
PCIE_C_TX_P: U1.B3
PCIE_REXT: U1.A2
PCIE_RX_N_[03] - CONNECTORS.SCHDOC: J2.52
PCIE_RX_N_[05] - CPU - PCIE, SATA.SCHDOC: U1.B1
PCIE_RX_P_[03] - CONNECTORS.SCHDOC: J2.54
PCIE_RX_P_[05] - CPU - PCIE, SATA.SCHDOC: U1.B2
PCIE_TX_N_[03] - CONNECTORS.SCHDOC: J2.51
PCIE_TX_P_[03] - CONNECTORS.SCHDOC: J2.53
PCIE_WAKE_[03] - CONNECTORS.SCHDOC: J2.39
PCIE_WAKE_[05] - CPU - PCIE, SATA.SCHDOC: U1.P3
PMIC_ON_REQ_[10] - CPU - JTAG, CONTROL.SCHDOC: U1.D11
PMIC_STBY_REQ: U1.F11
POR_BN: U1.C11
RGMII_INT_[07] - CPU - USB, ETHERNET.SCHDOC: U1.W22
RGMII_INT_R: U1.V21
RGMII_MDC_[07] - CPU - USB, ETHERNET.SCHDOC: U1.V20
RGMII_MDIO_[07] - CPU - USB, ETHERNET.SCHDOC: U1.V23
RGMII_R_TXCLK: U1.D21
RGMII_RSTN_R: U1.U21
RGMII_RXCLK_[07] - CPU - USB, ETHERNET.SCHDOC: U1.B25
RGMII_RXD0_[07] - CPU - USB, ETHERNET.SCHDOC: U1.C24
RGMII_RXD1_[07] - CPU - USB, ETHERNET.SCHDOC: U1.B23
RGMII_RXD2_[07] - CPU - USB, ETHERNET.SCHDOC: U1.B24
RGMII_RXD3_[07] - CPU - USB, ETHERNET.SCHDOC: U1.D23
RGMII_RXDV_[07] - CPU - USB, ETHERNET.SCHDOC: U1.D22
RGMII_TXD0_[07] - CPU - USB, ETHERNET.SCHDOC: U1.C22
RGMII_TXD1_[07] - CPU - USB, ETHERNET.SCHDOC: U1.F20
RGMII_TXD2_[07] - CPU - USB, ETHERNET.SCHDOC: U1.E21
RGMII_TXD3_[07] - CPU - USB, ETHERNET.SCHDOC: U1.A24
RGMII_TXEN_[07] - CPU - USB, ETHERNET.SCHDOC: U1.C23
RSTINN_[03] - CONNECTORS.SCHDOC: J1.8
RSTOUTN_[03] - CONNECTORS.SCHDOC: J1.7
RSTOUTN_R: U1.H19
RTC_XTALI: U1.D9
RTC_XTALO: U1.C9
SATA_C_RX_N: U1.A14
SATA_C_RX_P: U1.B14
SATA_C_TX_N: U1.B12
SATA_C_TX_P: U1.A12
SATA_REXT: U1.C14
SATA_RX_N_[03] - CONNECTORS.SCHDOC: J2.58
SATA_RX_P_[03] - CONNECTORS.SCHDOC: J2.60
SATA_TX_N_[03] - CONNECTORS.SCHDOC: J1.61 J1.62 J1.63 J1.64 J2.55 J2.56 J2.57 J2.59 J2.61 J2.62 J2.63 J2.64
SD2_ACT_[03] - CONNECTORS.SCHDOC: J2.11
SD2_ACT_[08] - CPU - SPI, I2C, SD, MMC.SCHDOC: U1.T3
SD2_CD_[03] - CONNECTORS.SCHDOC: J2.38
SD2_CD_[08] - CPU - SPI, I2C, SD, MMC.SCHDOC: U1.F16
SD2_CLK_[03] - CONNECTORS.SCHDOC: J2.36
SD2_CLK_R: U1.C21
SD2_CMD_[03] - CONNECTORS.SCHDOC: J2.21
SD2_CMD_R: U1.F19
SD2_DATA0_[03] - CONNECTORS.SCHDOC: J2.26
SD2_DATA0_[08] - CPU - SPI, I2C, SD, MMC.SCHDOC: U1.A22
SD2_DATA1_[03] - CONNECTORS.SCHDOC: J2.23
SD2_DATA1_[08] - CPU - SPI, I2C, SD, MMC.SCHDOC: U1.E20
SD2_DATA2_[03] - CONNECTORS.SCHDOC: J2.28
SD2_DATA2_[08] - CPU - SPI, I2C, SD, MMC.SCHDOC: U1.A23
SD2_DATA3_[03] - CONNECTORS.SCHDOC: J2.25
SD2_DATA3_[08] - CPU - SPI, I2C, SD, MMC.SCHDOC: U1.B22
SD2_DATA4_[03] - CONNECTORS.SCHDOC: J2.30
SD2_DATA4_[08] - CPU - SPI, I2C, SD, MMC.SCHDOC: U1.A19
SD2_DATA5_[03] - CONNECTORS.SCHDOC: J2.27
SD2_DATA5_[08] - CPU - SPI, I2C, SD, MMC.SCHDOC: U1.B18
SD2_DATA6_[03] - CONNECTORS.SCHDOC: J2.32
SD2_DATA6_[08] - CPU - SPI, I2C, SD, MMC.SCHDOC: U1.E17
SD2_DATA7_[03] - CONNECTORS.SCHDOC: J2.29
SD2_DATA7_[08] - CPU - SPI, I2C, SD, MMC.SCHDOC: U1.C18
SD2_WP_[03] - CONNECTORS.SCHDOC: J2.34
SD2_WP_[08] - CPU - SPI, I2C, SD, MMC.SCHDOC: U1.D17
SD3_CD_[03] - CONNECTORS.SCHDOC: J1.34
SD3_CD_[08] - CPU - SPI, I2C, SD, MMC.SCHDOC: U1.A18
SD3_CLK_[03] - CONNECTORS.SCHDOC: J1.27
SD3_CLK_R: U1.D14
SD3_CMD_[03] - CONNECTORS.SCHDOC: J1.33
SD3_CMD_R: U1.B13
SD3_DATA0_[03] - CONNECTORS.SCHDOC: J1.29
SD3_DATA0_[08] - CPU - SPI, I2C, SD, MMC.SCHDOC: U1.E14
SD3_DATA1_[03] - CONNECTORS.SCHDOC: J1.30
SD3_DATA1_[08] - CPU - SPI, I2C, SD, MMC.SCHDOC: U1.F14
SD3_DATA2_[03] - CONNECTORS.SCHDOC: J1.31
SD3_DATA2_[08] - CPU - SPI, I2C, SD, MMC.SCHDOC: U1.A15
SD3_DATA3_[03] - CONNECTORS.SCHDOC: J1.32
SD3_DATA3_[08] - CPU - SPI, I2C, SD, MMC.SCHDOC: U1.B15
SD3_WP_[03] - CONNECTORS.SCHDOC: J1.25
SD3_WP_[08] - CPU - SPI, I2C, SD, MMC.SCHDOC: U1.C17
TAMPER: U1.E11
TEST_MODE: U1.E12
TRD0_N_[03] - CONNECTORS.SCHDOC: J1.57
TRD0_P_[03] - CONNECTORS.SCHDOC: J1.59
TRD1_N_[03] - CONNECTORS.SCHDOC: J1.51
TRD1_P_[03] - CONNECTORS.SCHDOC: J1.53
TRD2_N_[03] - CONNECTORS.SCHDOC: J1.58
TRD2_P_[03] - CONNECTORS.SCHDOC: J1.60
TRD3_N_[03] - CONNECTORS.SCHDOC: J1.52
TRD3_P_[03] - CONNECTORS.SCHDOC: J1.54
UART1_CTS_[03] - CONNECTORS.SCHDOC: J1.11
UART1_CTS_[09] - CPU - UART, AUDIO.SCHDOC: U1.G21
UART1_DCD_[03] - CONNECTORS.SCHDOC: J1.16
UART1_DCD_[09] - CPU - UART, AUDIO.SCHDOC: U1.D25
UART1_DSR_[03] - CONNECTORS.SCHDOC: J1.9
UART1_DSR_[09] - CPU - UART, AUDIO.SCHDOC: U1.G22
UART1_DTR_[03] - CONNECTORS.SCHDOC: J1.15
UART1_DTR_[09] - CPU - UART, AUDIO.SCHDOC: U1.F22
UART1_RI_[03] - CONNECTORS.SCHDOC: J1.10
UART1_RI_[09] - CPU - UART, AUDIO.SCHDOC: U1.F23
UART1_RTS_[03] - CONNECTORS.SCHDOC: J1.13
UART1_RTS_[09] - CPU - UART, AUDIO.SCHDOC: U1.G20
UART1_RXD_[03] - CONNECTORS.SCHDOC: J1.14
UART1_RXD_[09] - CPU - UART, AUDIO.SCHDOC: U1.M3
UART1_TXD_[03] - CONNECTORS.SCHDOC: J1.12
UART1_TXD_[09] - CPU - UART, AUDIO.SCHDOC: U1.M1
UART2_CTS_[03] - CONNECTORS.SCHDOC: J2.31
UART2_CTS_[09] - CPU - UART, AUDIO.SCHDOC: U1.B20
UART2_RTS_[03] - CONNECTORS.SCHDOC: J2.33
UART2_RTS_[09] - CPU - UART, AUDIO.SCHDOC: U1.C19
UART2_RXD_[03] - CONNECTORS.SCHDOC: J2.35
UART2_RXD_[09] - CPU - UART, AUDIO.SCHDOC: U1.E18
UART2_TXD_[03] - CONNECTORS.SCHDOC: J2.37
UART2_TXD_[09] - CPU - UART, AUDIO.SCHDOC: U1.D19
USB0_ID_[03] - CONNECTORS.SCHDOC: J1.20
USB0_ID_[07] - CPU - USB, ETHERNET.SCHDOC: U1.T4
USB0_N_[03] - CONNECTORS.SCHDOC: J1.22
USB0_N_[07] - CPU - USB, ETHERNET.SCHDOC: U1.B6
USB0_P_[03] - CONNECTORS.SCHDOC: J1.24
USB0_P_[07] - CPU - USB, ETHERNET.SCHDOC: U1.A6
USB0_PWR_EN_[03] - CONNECTORS.SCHDOC: J1.26
USB0_PWR_EN_[07] - CPU - USB, ETHERNET.SCHDOC: U1.E23
USB1_N_[03] - CONNECTORS.SCHDOC: J2.40
USB1_N_[07] - CPU - USB, ETHERNET.SCHDOC: U1.F10
USB1_P_[03] - CONNECTORS.SCHDOC: J2.42
USB1_P_[07] - CPU - USB, ETHERNET.SCHDOC: U1.E10
USB1_PWR_EN_[03] - CONNECTORS.SCHDOC: J2.44
USB1_PWR_EN_[07] - CPU - USB, ETHERNET.SCHDOC: U1.H21
USB_OC_[03] - CONNECTORS.SCHDOC: J1.28
USB_OC_[07] - CPU - USB, ETHERNET.SCHDOC: U1.H20 U1.J20
USER_LED_[10] - CPU - JTAG, CONTROL.SCHDOC: U1.T1
WD_OUT: U1.R22
ZQPAD: U1.AE17

Pads without a net: J1 49 65 66; J2 65 66; U1 A9 A10 A11 A16 A20 A21 AA1 AA2 AA3 AA4 AA11 AB1 AB2 AB17 AD17 B8 B9 B10 B11 B16 B17 B19 B21 C5 C13 C15 C16 C20 C25 D1 D2 D4 D5 D13 D15 D18 D20 E1 E2 E3 E4 E13 E16 E19 E22 E24 E25 F1 F2 F3 F4 F13 F15 F17 F24 F25 G1 G2 G4 G23 G25 H1 H2 H3 H4 H22 H23 H24 J19 J21 J22 J23 J24 J25 K20 K21 K22 K23 K24 K25 L1 L3 L4 L6 L20 L21 L22 L23 L24 L25 M2 M4 M5 M6 M20 M21 M22 M23 M24 M25 N2 N19 N20 N21 N22 N23 N24 N25 P1 P4 P5 P6 P20 P21 P25 R1 R2 R3 R4 R5 R6 R7 R20 R21 R23 R24 T2 T6 T20 T22 T23 T24 T25 U6 U7 U20 U22 U25 V5 V6 V24 W5 W6 W20 W21 W23 W24 Y1 Y2 Y3 Y4; U2 J1 J9 L1 L9; U3 J1 J9 L1 L9; U4 J1 J9 L1 L9; U5 J1 J9 L1 L9
